# Altium PCB PCB1.PcbDoc
Units mil, origin at the board's own origin, x right, y up, seen from the top; angles counter-clockwise.
Board outline 2510.03 x 1810.03 mil, 2 copper layers (Top Layer, Bottom Layer); 14 components, 18 nets, 64 pads, 2 vias.
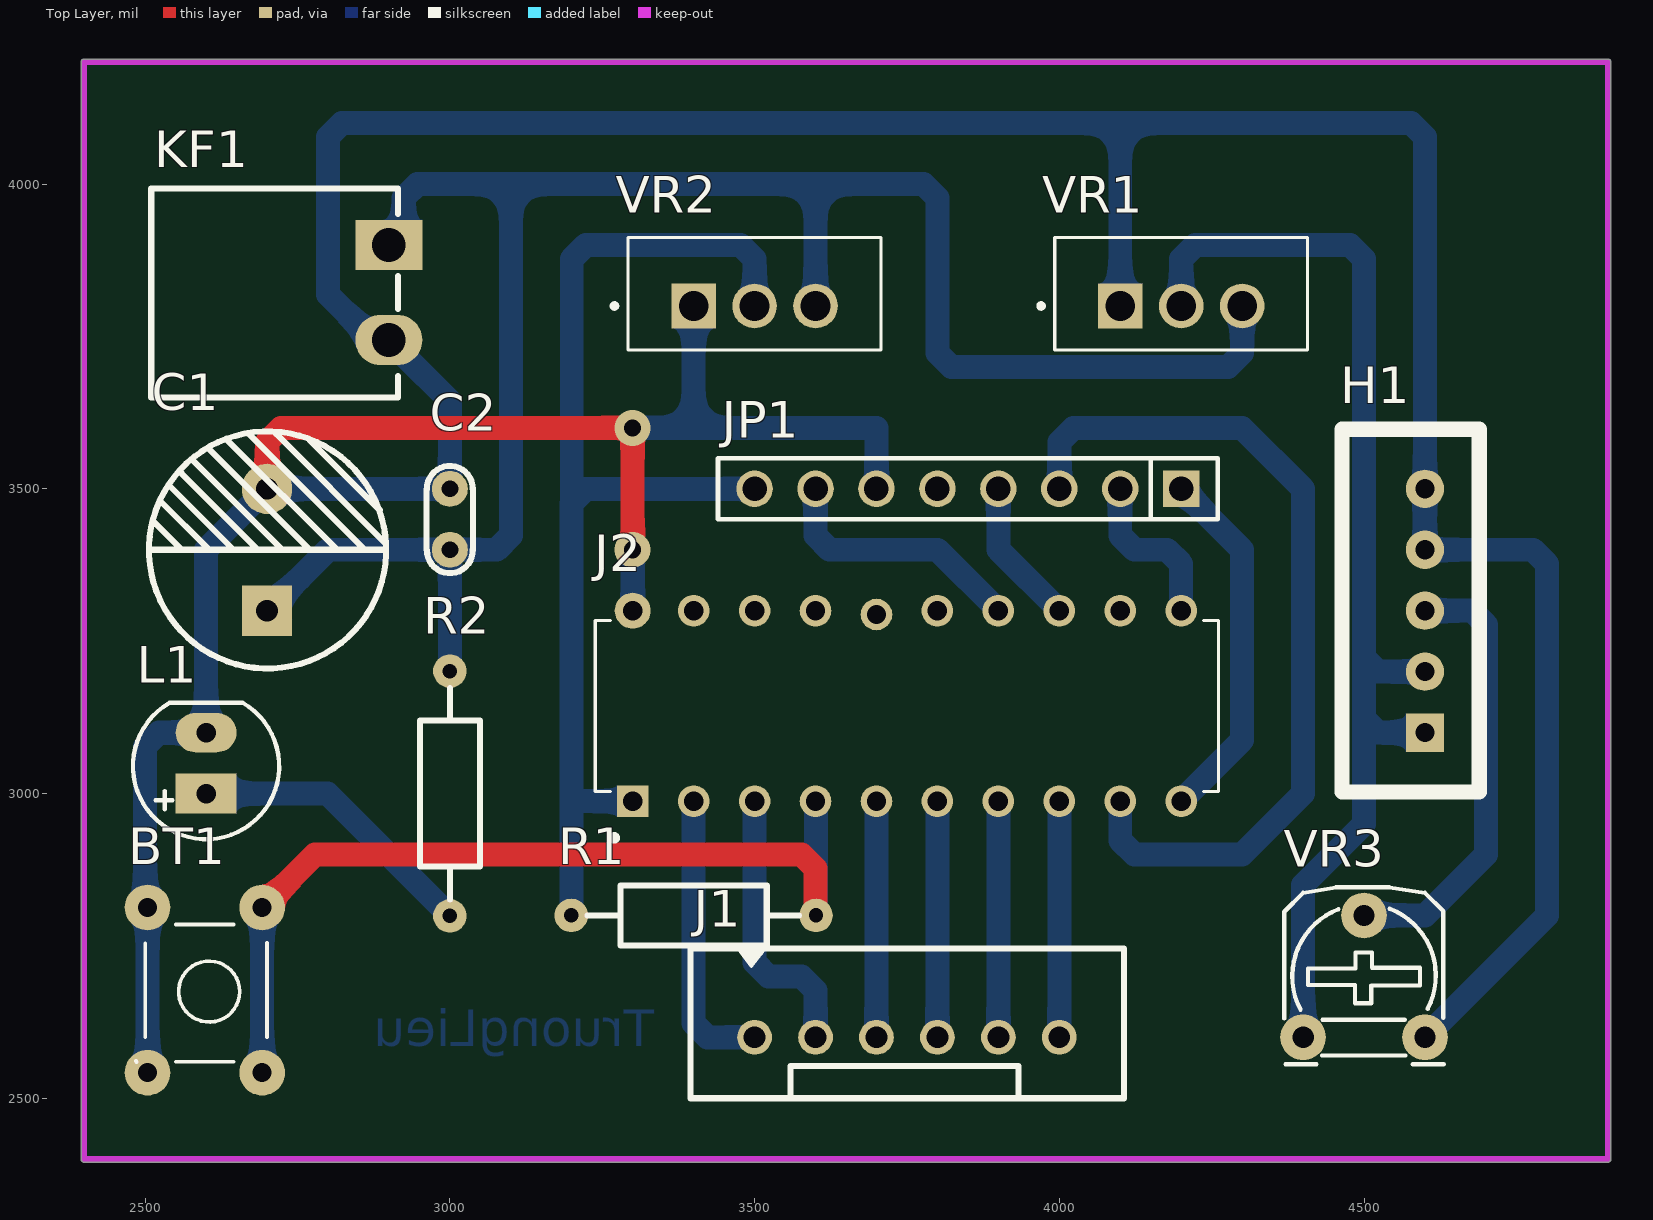
[diagram p0: Top Layer view]
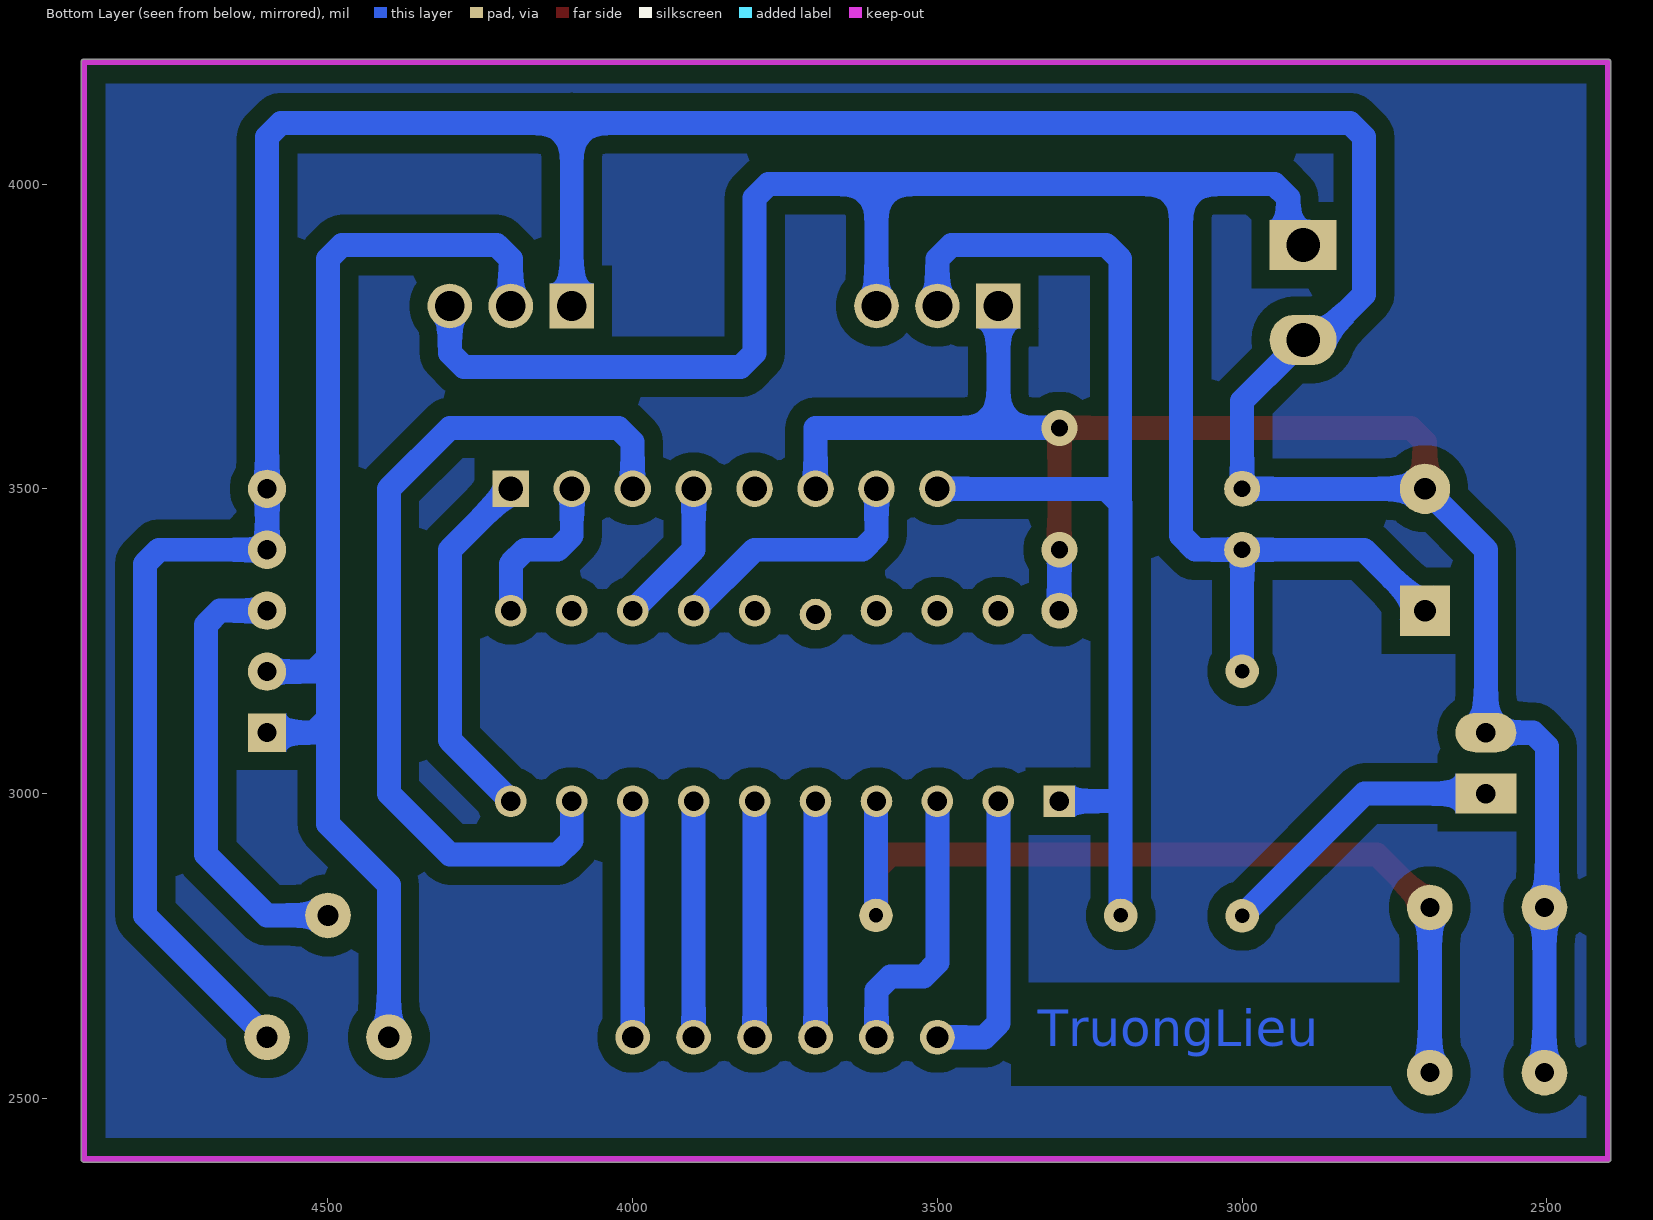
[diagram p1: Bottom Layer view, seen from below]
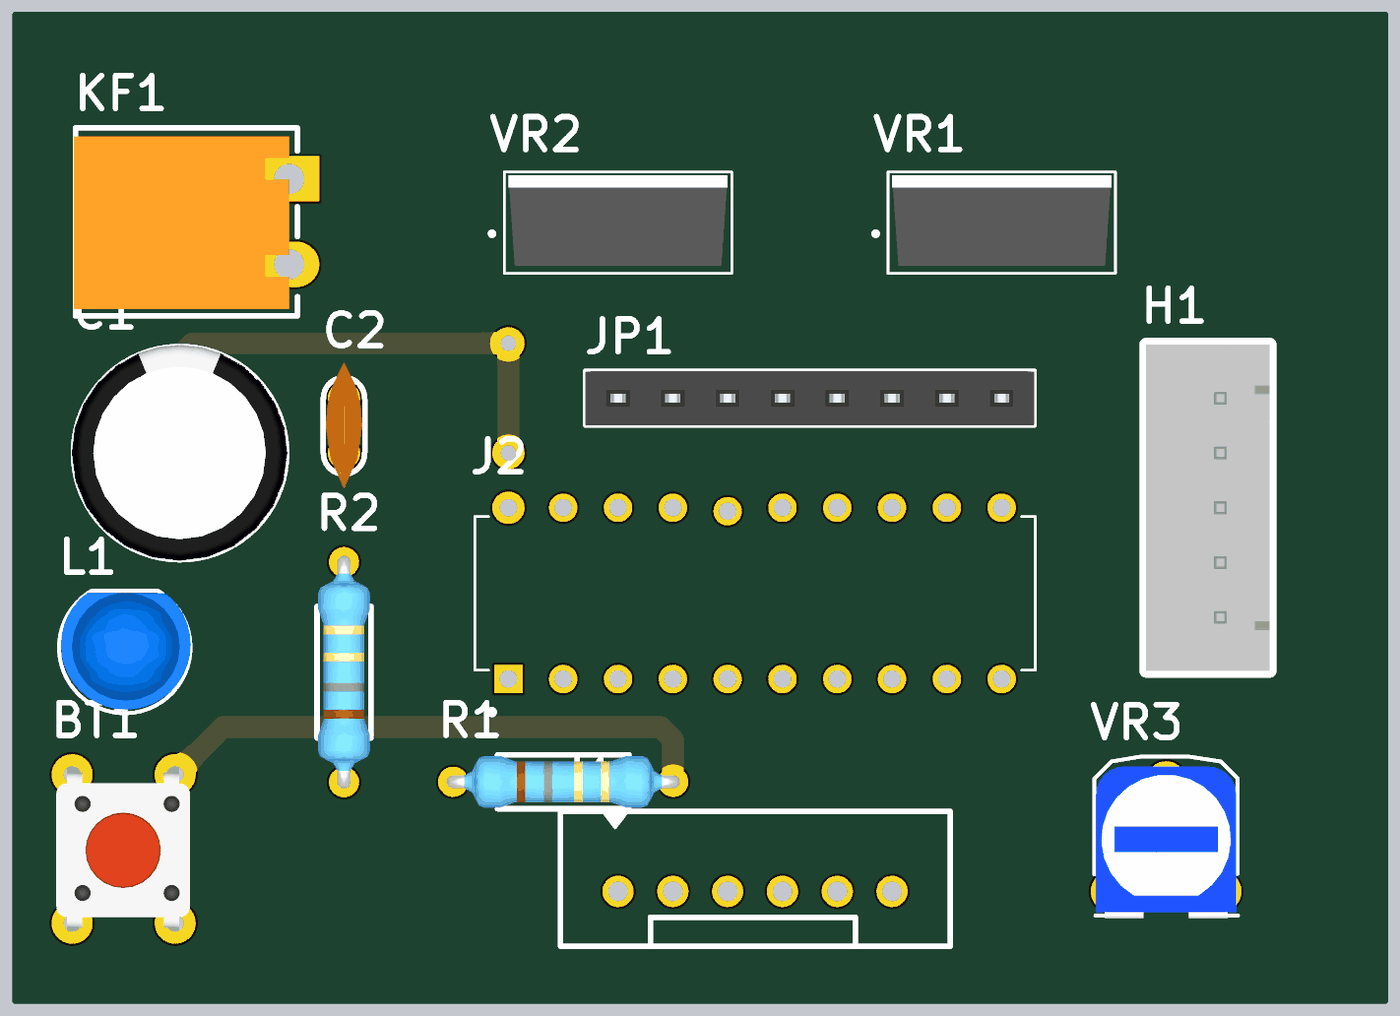
[diagram p2: 3D render of the assembled board from above, using the file's embedded part models]

## Layer stack, top to bottom
Top Solder: solder mask 0.4, Solder Resist, Dk 3.5
Top Layer: signal copper 1.4
Dielectric 1: dielectric 12.6, FR-4, Dk 4.8
Bottom Layer: signal copper 1.4
Bottom Solder: solder mask 0.4, Solder Resist, Dk 3.5

## Board outline
2400,2394.99 cw(c2400,2400) 2394.99,2400 2394.99,4200 cw(c2400,4200) 2400,4205.02 4900,4205.02 cw(c4900,4200) 4905.02,4200 4905.02,2400 cw(c4900,2400) 4900,2394.99

## Design rules (kind name [scope] priority, off if disabled: settings)
Clearance [All] p1: gap=25 ignorepadtopadclearanceinfootprint=FALSE
PolygonConnect [All] p1: connectstyle=Relief reliefconductorwidth=10 reliefentries=4 polygonreliefangle="90 Angle" airgapwidth=10
RoutingVias [All] p1: holewidth=28 width=50 viastyle="Through Hole" minholewidth=28 minwidth=50 maxholewidth=28 maxwidth=50
SolderMaskExpansion [All] p1: expansion=4 istentingtop=FALSE
Width [All] p1: maxlimit=39.37 minlimit=11.81 preferedwidth=19.68
30 further rules are at their usual default settings.

## Components (designator, comment, footprint, x,y, rotation, side; value= is the part's Value field where it differs from the comment)
BT1 "Nut Nhan 4 Chan Cam 6x6" "Nut Nhan 4 Chan Cam 6x6" 2700,2800 r270 top
C1 "2200uF" "tu hoa 10mm" 2700,3400 r90 top
C2 "104" "tu gom" 3000,3450 r90 top
H1 "LCD_PWR" XH2.54M-5 4600,3100 r90 top
J1 "LCD" CON6_100_B6B-XH-A_TH_ST 3500,2600 r0 top
J2 "PIC18F14K22-I/P" DIP793W45P254L2598H533Q20 3750,3143.74 r90 top
JP1 "RC522" "JP 1x8 CT" 4200,3500 r180 top
KF1 "CON 2 HT3.96" "CON 2 HT3.96" 2900,3900 r270 top
L1 "LED 5mm" LED-5MM-BLUE 2600,3045 r90 top
R1 "1k" "tro vach 1/4w" 3400,2800 r180 top
R2 "1k" "tro vach 1/4w" 3000,3000 r270 top
VR1 "LM1117T-3.3/NOPB" TO254P1054X470X1955-3 4200,3800 r0 top
VR2 "LM1117T-3.3/NOPB" TO254P1054X470X1955-3 3500,3800 r0 top
VR3 "1K" "Bien Tro Tam Giac Dung" 4400,2600 r0 top

## Footprints (in the part's own frame and the unit in brackets; to place one, negate y for a bottom-side part, rotate by r counter-clockwise, add the part's x,y. Pads: shape width x height; smd on the part's side, far side on the other; paste and mask are expansions set on the pad)
"Bien Tro Tam Giac Dung" [mil] "RM065"
  round 75 hole 35: 1(0,0) 2(100,200) 3(200,0)
  silkscreen extent -31,-44 231,246, body extent -28,-50 228,228, height 279
CON6_100_B6B-XH-A_TH_ST [mm] "Connector Header"
  round 1.45 hole 0.91: 1(0,0) 2(2.54,0) 3(5.08,0) 4(7.62,0) 5(10.16,0) 6(12.7,0)
  silkscreen extent -2.67,-2.54 15.39,3.71, body extent -2.42,-2.32 15.12,3.43, height 7
"CON 2 HT3.96" [mm]
  rect 2.1x2.794 hole 1.4: 1(0,0)
  oval 2.1x2.794 hole 1.4: 2(3.96,0)
  silkscreen extent -2.36,-9.91 6.35,0.38, body extent -1.97,-10 6.03,0, height 7.02
DIP793W45P254L2598H533Q20 [mm]
  rect 1.318x1.318 hole 0.81: 1(-3.969,11.43)
  round 1.318 hole 0.81: 2(-3.969,8.89) 3(-3.969,6.35) 4(-3.969,3.81) 5(-3.969,1.27) 6(-3.969,-1.27) 7(-3.969,-3.81) 8(-3.969,-6.35) 9(-3.969,-8.89) 10(-3.969,-11.43) 11(3.969,-11.43) 12(3.969,-8.89) 13(3.969,-6.35) 14(3.969,-3.81) 15(3.969,-1.27) 16(3.81,1.27) 17(3.969,3.81) 18(3.969,6.35) 19(3.969,8.89)
  round 1.5 hole 0.81: 20(3.969,11.43)
  silkscreen extent -5.62,-12.99 3.56,12.99
"JP 1x8 CT" [mm] "8 row, straight, gold plating"
  rect 1.52x1.52 hole 1.02: 1(0,0)
  round 1.52 hole 1.02: 2(2.54,0) 3(5.08,0) 4(7.62,0) 5(10.16,0) 6(12.7,0) 7(15.24,0) 8(17.78,0)
  silkscreen extent -1.52,-1.27 19.3,1.27, body extent -1.52,-1.25 19.3,1.25, height 8.51
LED-5MM-BLUE [mil] "LED 2 PIN, 5 ly , Only colour, pin to pin 110mil"
  rect 65x100 hole 32: 1(-45,0)
  oval 65x100 hole 32: 2(55,0)
  silkscreen extent -120,-120 104,120, body extent -113,-120 100,117, height 339
"Nut Nhan 4 Chan Cam 6x6" [mil] "SW button 4pin, 250 x250 mil"
  round 75 hole 31: 1(-13,-8) 1(258,-8) 2(-13,-196) 2(258,-196)
  silkscreen extent 15,-215 240,0, body extent -31,-225 281,19, height 276
TO254P1054X470X1955-3 [mm]
  rect 1.86x1.86 / inner round 1.86 / far side rect 1.86x1.86 hole 1.24: 1(-2.54,0)
  round 1.86 hole 1.24: 2(0,0) 3(2.54,0)
  silkscreen extent -5.94,-1.84 5.27,2.86, body extent -5.08,-1.49 5.08,2.71, height 22.86
"tro vach 1/4w" [mm]
  round 1.4 hole 0.6: 1(-5.1,0) 2(5.1,0)
  silkscreen extent -4.39,-1.25 4.42,1.25, body extent -5.38,-1.2 5.38,1.2, height 2.41
"tu gom" [mm] "Tu gom mini"
  round 1.5 hole 0.7: 1(-1.27,0) 2(1.27,0)
  silkscreen extent -2.25,-0.97 2.22,0.97, body extent -2.92,-0.85 2.92,0.85, height 6.12
"tu hoa 10mm" [mm]
  rect 2.1x2.1 hole 0.9: 1(-2.54,0)
  round 2.1 hole 0.9: 2(2.54,0)
  silkscreen extent -4.95,-4.96 4.93,4.92, body extent -5,-5 4.97,5, height 20.01
XH2.54M-5 [mm]
  rect 1.6x1.6 hole 0.8: 1(0,0)
  round 1.6 hole 0.8: 2(2.54,0) 3(5.08,0) 4(7.62,0) 5(10.16,0)
  silkscreen extent -2.48,-2.26 12.64,3.46, body extent -2.48,-2.26 12.64,3.48, height 6.91

## Part data
BT1: "Nut Nhan 4 Chan 6x6mm", Ma_Hang=MH004584, Ten="Nút Nhấn 4 Chân 6x6x5MM DIP"
C1: library part "Tu Hoa 2200uF 16V 10x20", "Cắm", Chung_Loai=Cắm, Don_Vi=Con, Ma_Hang=MH002316, So_Chan=2, Ten_Linh_Kien="Tụ Hóa 2200uF 16V 10x20MM"
C2: library part "Tu gom 104 50V", "Cắm", Chung_Loai=Cắm, Don_Vi=Con, Ma_Hang=MH004761, So_Chan=2, Ten_Linh_Kien="Tụ gốm 104 100nF 50V"
H1: library part "Header 5P 2.54 Duc Thang", "Cắm", Chung_Loai=Cắm, Don_Vi=Con, Ma_Hang=MH001298, Ten_Linh_Kien="Header 5P XH2.54-5P Đực Thẳng"
J1: library part CON-PLG_6X1-100-ST-TH, "6 Pins, 1 Row 2.54mm Pitch, straight Connector, male", Alternate Part Number-1=NA, Case/Package=TH-CON, Crimp Part Number=ASXHSXH22K51, Manufacturer=JST, Manufacturer Part Number=B6B-XH-A(LF)(SN), Mating Part Number=XHP-6, Supplier Part Number-1=B6B-XH-A(LF)(SN), Supplier-1=ARROW
J2: Package=None, Availability=Unavailable, MP=PIC18F14K22-I/P, Price=None
JP1: library part "JP 1x8 2.54 Cai Thang", "Cắm", Chung_Loai=Cắm, Don_Vi=Con, Ma_Hang=MH004006, Ten_Linh_Kien="Jump Đơn Cái 2.54MM 1x20P Thẳng"
KF1: "Cắm", Chung_Loai=Cắm, Don_Vi=Con, Ma_Hang=MH000984, Ten_Linh_Kien="CON 2 HT3.96-2P 3.96MM (Cam Cong)"
L1: library part "LED 5mm Xanh Duong", "Cắm", Chung_Loai=Cắm, Don_Vi=Con, Ma_Hang=MH008987, Ten_Linh_Kien="Led 5MM Xanh Dương Đục (1000c)"
R1 R2: library part "Tro Vach 1/4W 5% 1k", "Cắm", Chung_Loai=Cắm, Don_Vi=Con, Ma_Hang=MH007390, So_Chan=2, Ten_Linh_Kien="Trở Vạch 1/4w 5% 1k"
VR1 VR2: "800-mA 15-V linear voltage regulator", Package="TO-220-3 Texas Instruments", Availability="In Stock", Check_prices=https://www.snapeda.com/parts/LM1117T-3.3/NOPB/Texas+Instruments/view-part/?ref=eda, MF="Texas Instruments", MP=LM1117T-3.3/NOPB, Price=None, Purchase-URL=https://pricing.snapeda.com/search/part/LM1117T-3.3/NOPB/?ref=eda, SnapEDA_Link=https://www.snapeda.com/parts/LM1117T-3.3/NOPB/Texas+Instruments/view-part/?ref=snap
VR3: library part "Bien tro tam giac 1K Dung", "Cắm", Chung_Loai=Cắm, Don_Vi=Con, Ma_Hang=MH003709, Ten_Linh_Kien="Biến Trở Tam Giác 102-1K RM065"

## Via types
v1: diameter 59.06, hole 28, Top Layer to Bottom Layer, 2 vias

## Nets (pads, with @x,y where several pads share a name; then routed paths per layer and width w, separated by ;. In a path a pad name is that pad's centre, name@x,y a point inside that pad or via, vN(x,y) a via of type N, cw(c..) or ccw(c..) an arc to the next point about the centre after c; other vN are vias at no path point)
3.3: J2.1 JP1.8 R1.2 VR2.2 | length 1888.8
  Bottom Layer w39.37: R1.2 3199.21,3000 ; J2.1 3211.73,2987.48 3199.21,3000 ; JP1.8 3223.06,3500 3200,3476.94 ; VR2.2 3500,3876.94 3476.94,3900 3223.06,3900 3200,3876.94 3200,3476.94 ; 3199.21,3000 3199.21,3476.15 3200,3476.94
3.3V: H1.1 H1.2 VR1.2 VR3.1 | length 1933.5
  Bottom Layer w39.37: VR1.2 4200,3876.94 4223.06,3900 4476.94,3900 4500,3876.94 4500,3223.06 ; VR3.1 4400,2850 4500,2950 4500,3123.06 ; H1.1 4523.06,3100 4500,3123.06 ; H1.2 4523.06,3200 4500,3223.06 ; 4500,3123.06 4500,3223.06
12v: C1.1 C2.1 KF1.1 R2.1 VR1.3 VR2.3 | length 3260.4
  Bottom Layer w39.37: C1.1 2800,3400 C2.1 ; KF1.1 2902.52,3900 2924.18,3921.65 2924.18,3976.94 2947.24,4000 3100,4000 ; R2.1 C2.1 ; VR2.3 3600,4000 ; VR1.3 4300,3723.06 4276.94,3700 3823.06,3700 3800,3723.06 3800,3976.94 3776.94,4000 3600,4000 ; C2.1 3076.94,3400 3100,3423.06 3100,4000 ; 3100,4000 3600,4000
d4: J1.3 J2.5 | length 387.5
  Bottom Layer w39.37: J1.3 J2.5
d5: J1.4 J2.6 | length 387.5
  Bottom Layer w39.37: J1.4 J2.6
d6: J1.5 J2.7 | length 387.5
  Bottom Layer w39.37: J1.5 J2.7
d7: J1.6 J2.8 | length 387.5
  Bottom Layer w39.37: J1.6 J2.8
en: J1.2 J2.3 | length 460.5
  Bottom Layer w39.37: J2.3 3500,2723.06 3523.06,2700 3576.94,2700 3600,2676.94 J1.2
gnd: BT1.2 C1.2 C2.2 H1.4 H1.5 J2.20 JP1.6 KF1.2 L1.2 VR1.1 VR2.1 VR3.3 | length 7615.6
  Top Layer w39.37: C1.2 2700,3576.94 2723.06,3600 v1(3300,3600) v1(3300,3400)
  Bottom Layer w39.37: BT1.2@2504,2542 2504,2813 2500,2817 2500,3076.94 2523.06,3100 L1.2 2600,3400 C1.2 C2.2 3000,3644.09 2921.95,3722.15 2921.95,3724.09 2901.94,3744.09 KF1.2 2874.62,3744.09 2800,3818.71 2800,4076.94 2823.06,4100 4576.94,4100 4600,4076.94 H1.5 H1.4 4776.94,3400 4800,3376.94 4800,2800 VR3.3 ; J2.20 v1(3300,3400) ; v1(3300,3600) 3400,3600 ; VR2.1 3400,3600 ; JP1.6 3700,3600 3400,3600 ; VR1.1 4100,4100.36
NetH1_3: H1.3 VR3.2 | length 727.9
  Bottom Layer w39.37: VR3.2 4600,2800 4700,2900 4700,3276.94 4676.94,3300 H1.3
NetL1_1: L1.1 R2.2 | length 483.2
  Bottom Layer w39.37: L1.1 2799.21,3000 R2.2
reset: BT1.1 J2.4 R1.1 | length 1489.7
  Top Layer w39.37: BT1.1@2692,2813 2779,2900 3576.94,2900 3600,2876.94 3600,2800.79 R1.1
  Bottom Layer w39.37: BT1.1@2692,2542 BT1.1@2692,2813 ; J2.4 3600.39,2987.09 3600.39,2800.39 R1.1
rs: J1.1 J2.2 | length 474
  Bottom Layer w39.37: J2.2 3400,2623.06 3423.06,2600 J1.1
rst: J2.14 JP1.7 | length 427.9
  Bottom Layer w39.37: JP1.7 3600,3423.06 3623.06,3400 3800,3400 J2.14
sck: J2.11 JP1.2 | length 273
  Bottom Layer w39.37: JP1.2 4100,3423.06 4123.06,3400 4176.94,3400 4200,3376.94 J2.11
sdi: J2.13 JP1.4 | length 241.4
  Bottom Layer w39.37: JP1.4 3900,3400 J2.13
sdo: J2.9 JP1.3 | length 1443.3
  Bottom Layer w39.37: JP1.3 4000,3576.94 4023.06,3600 4300,3600 4400,3500 4400,3000 4300,2900 4123.06,2900 4100,2923.06 J2.9
ss: J2.10 JP1.1 | length 595.4
  Bottom Layer w39.37: J2.10 4300,3087.48 4300,3400 JP1.1
pads on no net: J2.12 J2.15 J2.16 J2.17 J2.18 J2.19 JP1.5

## Polygon pours and split planes (outlines as drawn)
no net on Bottom Layer "NONET_L02_P000" (solid, pour order 0): 4900,4200 4900,2400 2400,2400 2400,4200

## Keep-outs
Keep-Out Layer:
  lines w10: 2400,2400 2400,4200 4900,4200 4900,2400 2400,2400

## Other copper
Bottom Layer:
  text "TruongLieu" at 3335,2584.99 h60